# Altium PCB PCB1.PcbDoc
Units mil, origin at the board's own origin, x right, y up, seen from the top; angles counter-clockwise.
Board outline 2740 x 2170 mil, 2 copper layers (Top Layer, Bottom Layer); 18 components, 22 nets, 61 pads, 1 vias.
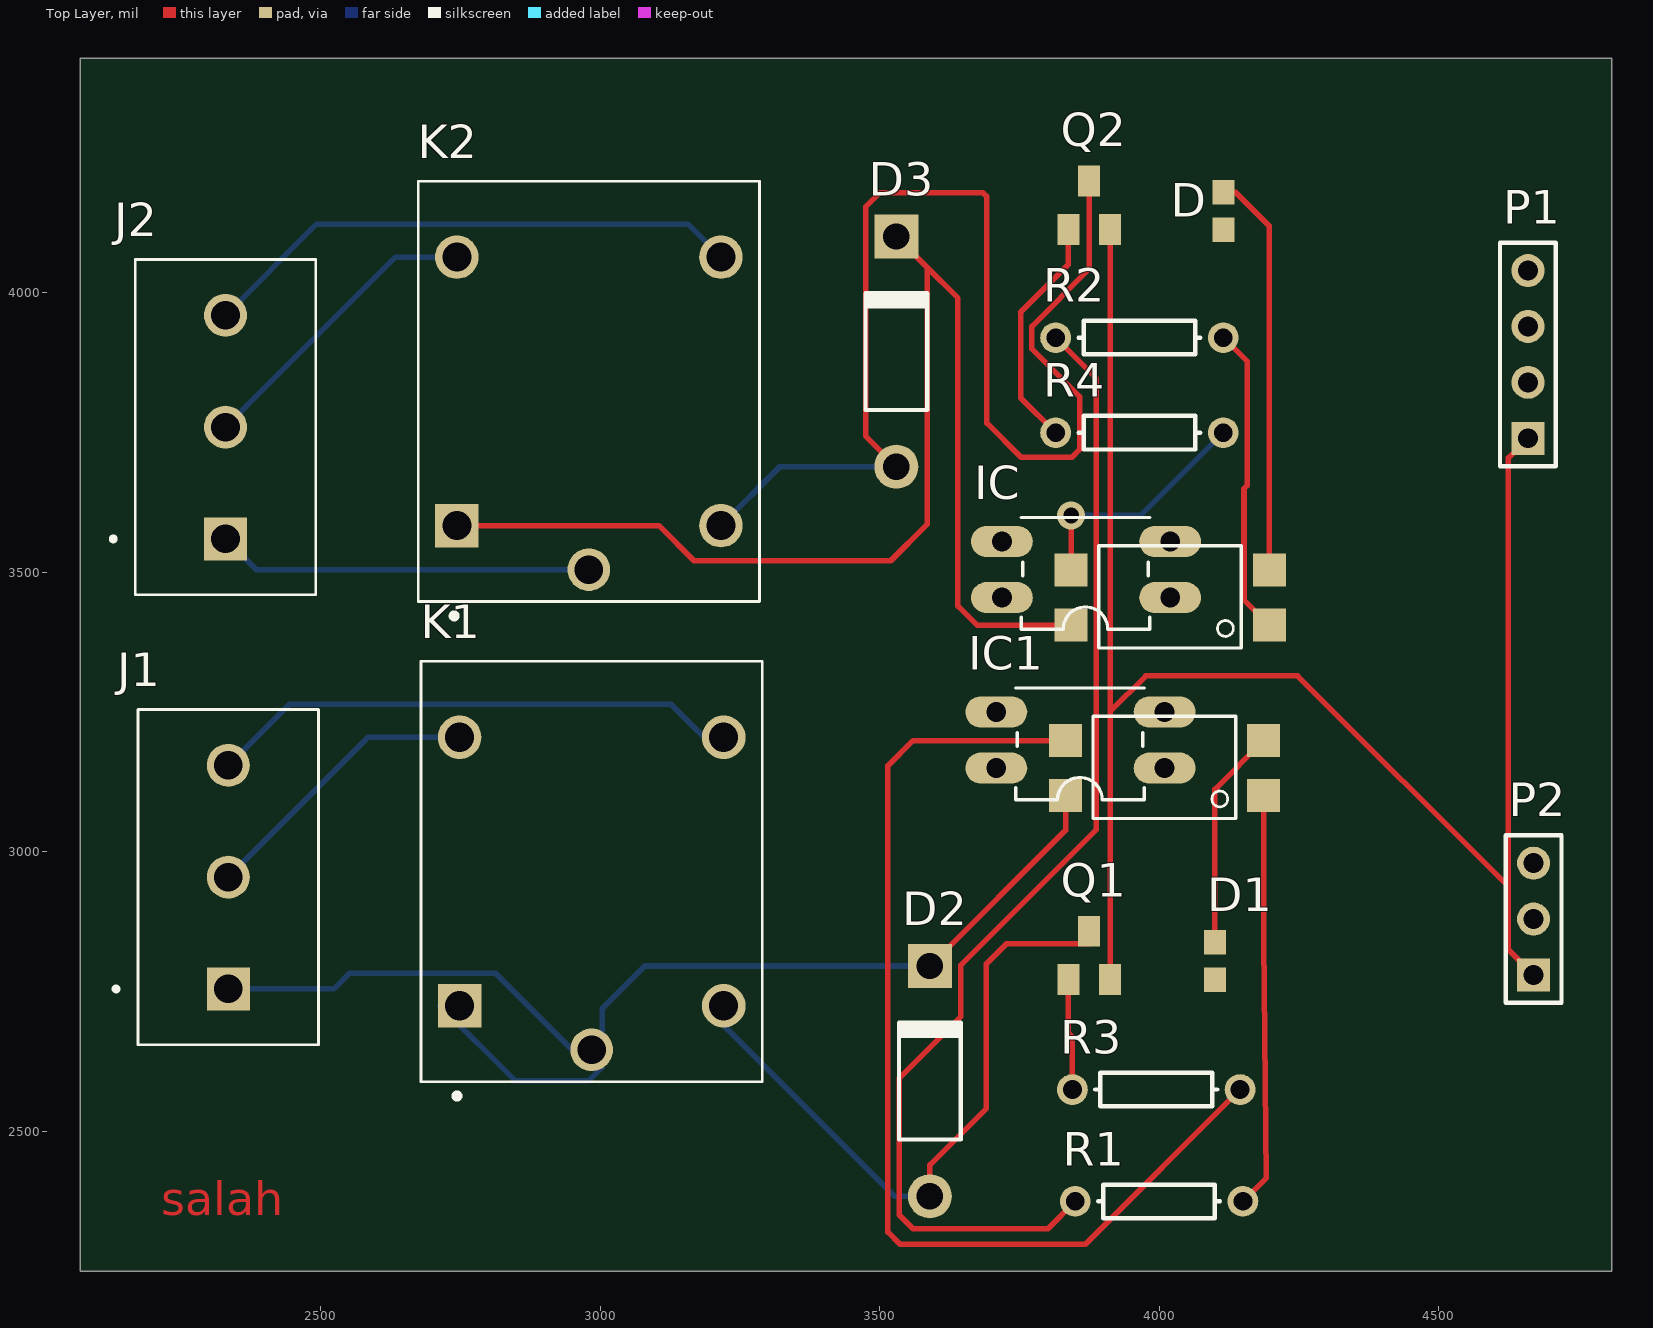
[diagram p0: Top Layer view]
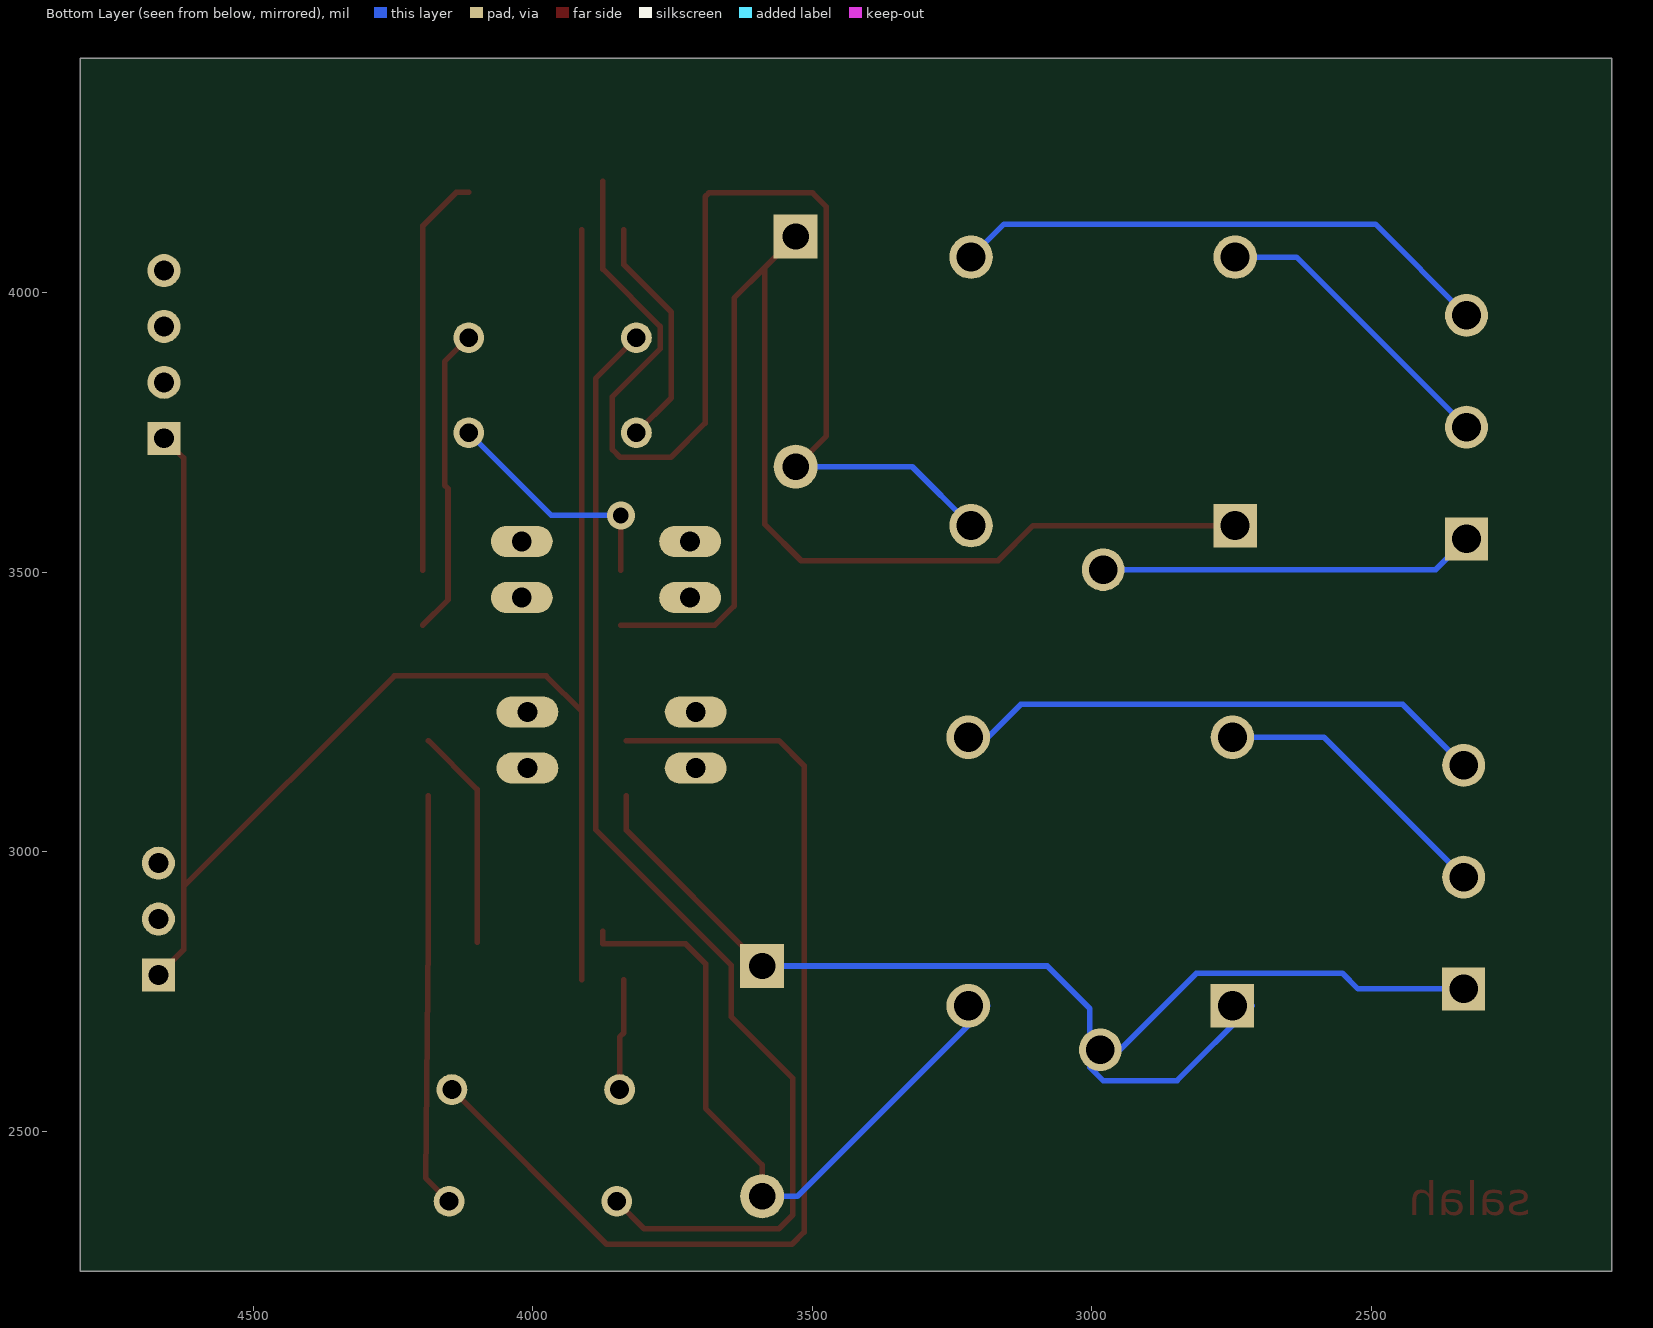
[diagram p1: Bottom Layer view, seen from below]
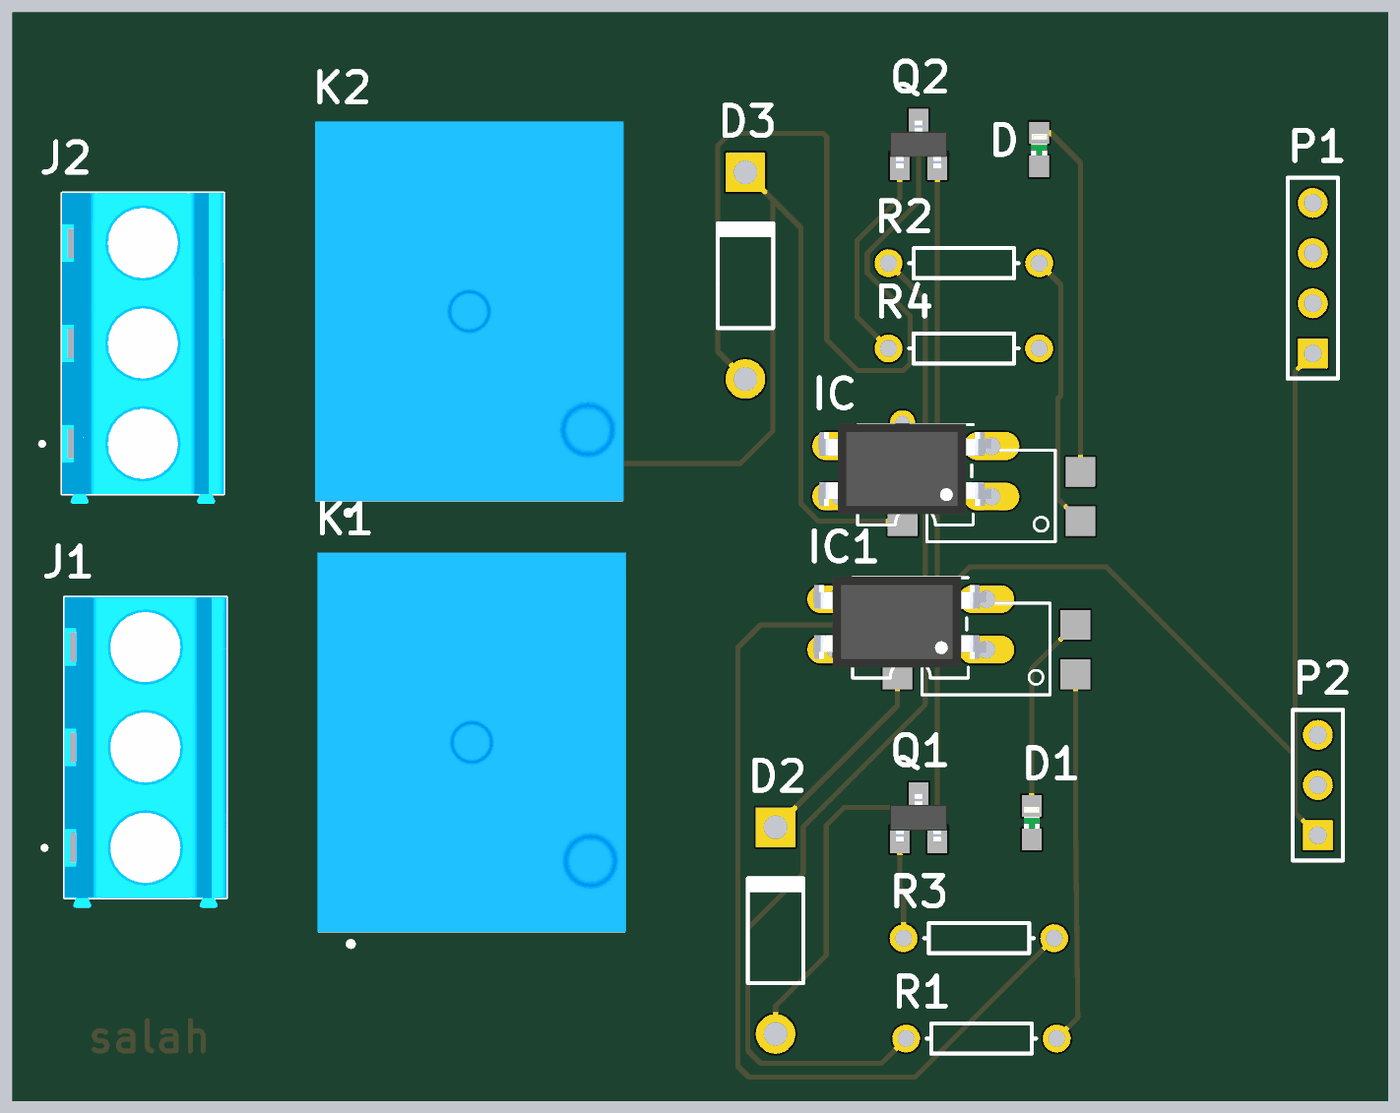
[diagram p2: 3D render of the assembled board from above, using the file's embedded part models]

## Layer stack, top to bottom
Top Solder: solder mask 0.4, Solder Resist, Dk 3.5
Top Layer: signal copper 1.4
Dielectric 1: dielectric 12.6, FR-4, Dk 4.8
Bottom Layer: signal copper 1.4
Bottom Solder: solder mask 0.4, Solder Resist, Dk 3.5

## Board outline
2070,2250 4810,2250 4810,4420 2070,4420

## Design rules (kind name [scope] priority, off if disabled: settings)
Clearance [All] p1: gap=10 ignorepadtopadclearanceinfootprint=FALSE except(0: Arc-Hole Track-Hole SMDPad-Hole THPad-Hole Via-Hole Fill-Hole Poly-Hole Region-Hole Text-Hole)
PolygonConnect [All] p1: connectstyle=Relief reliefconductorwidth=10 reliefentries=4 polygonreliefangle="90 Angle" airgapwidth=10
RoutingVias [All] p1: holewidth=28 width=50 viastyle="Through Hole" minholewidth=28 minwidth=50 maxholewidth=28 maxwidth=50
SolderMaskExpansion [All] p1: expansion=4 istentingtop=FALSE
Width [All] p1: maxlimit=10 minlimit=10 preferedwidth=10
30 further rules are at their usual default settings.

## Components (designator, comment, footprint, x,y, rotation, side; value= is the part's Value field where it differs from the comment)
D "LTST-C193TBKT-5A" 0603 4115,4146.54 r90 top
D1 "LTST-C193TBKT-5A" 0603 4100,2805 r90 top
D2 "Diode 1N4003" DO-41 3590,2590 r90 top
D3 "Diode 1N4003" DO-41 3530,3895 r90 top
IC "LTV-817" DIP-4 4020,3455 r90 top
IC1 "LTV-817" DIP-4 4010,3150 r90 top
J1 "TB006-508-03BE" CUI_TB006-508-03BE 2335,2755 r90 top
J2 "TB006-508-03BE" CUI_TB006-508-03BE 2330,3560 r90 top
K1 "SRD-05VDC-SL-C" RELAY_SRD-05VDC-SL-C 2985,2965 r90 top
K2 "SRD-05VDC-SL-C" RELAY_SRD-05VDC-SL-C 2980,3823.9 r90 top
P1 "Header 4" HDR1X4 4660,3740 r90 top
P2 "Header 3" HDR1X3 4670,2780 r90 top
Q1 "BCW31*" SOT23-BEC 3875,2815 r0 top
Q2 "BCW31*" SOT23-BEC 3875,4156.69 r0 top
R1 "Res1" AXIAL-0.3 4000,2375 r180 top value=1K
R2 "Res1" AXIAL-0.3 3965,3920 r180 top value=1K
R3 "Res1" AXIAL-0.3 3995,2575 r180 top value=510R
R4 "Res1" AXIAL-0.3 3965,3750 r180 top value=510R

## Footprints (in the part's own frame and the unit in brackets; to place one, negate y for a bottom-side part, rotate by r counter-clockwise, add the part's x,y. Pads: shape width x height; smd on the part's side, far side on the other; paste and mask are expansions set on the pad)
0603 [mm]
  rect 1.1x1 smd: 1(-0.85,0) 2(0.85,0)
  body extent -0.8,-0.4 0.8,0.4
AXIAL-0.3 [mm] "Axial Device, Thru-Hole; 2 Leads; 0.3 in Pin Spacing"
  round 1.4 hole 0.85: 1(-3.81,0) 2(3.81,0)
  silkscreen extent -2.77,-0.76 2.77,0.76
CUI_TB006-508-03BE [mm]
  rect 1.95x1.95 / inner round 1.95 / far side rect 1.95x1.95 hole 1.3: 1(0,0)
  round 1.95 hole 1.3: 2(5.08,0) 3(10.16,0)
  silkscreen extent -2.54,-4.1 12.7,5.2, body extent -3.04,-4.1 12.7,4.1, height 10
DIP-4 [mm]
  rect 1.5x1.5 smd: 1(-1.25,-4.5) 2(1.25,-4.5) 3(1.25,4.5) 4(-1.25,4.5)
  oval 1.408x2.816 hole 0.9: P$1(0,0) P$2(2.55,0) P$3(2.55,7.65) P$4(0,7.65)
  silkscreen extent -2.29,-3.22 3.64,6.77, body extent -0.9,0 3.7,9.06, height 5
DO-41 [mm] "Diode, Axial; Body 5.2 x 2.7 mm (LxDia. max), Lead Dia. 0.86 mm (max)"
  round 2 hole 1.2: 1(-5.23,0)
  rect 2x2 hole 1.2: 2(5.23,0)
  silkscreen extent -2.65,-1.4 2.75,1.4
HDR1X3 [mm] "Connector; Header; 3 Position"
  rect 1.5x1.5 hole 0.9: 1(0,0)
  round 1.5 hole 0.9: 2(2.54,0) 3(5.08,0)
  silkscreen extent -1.27,-1.27 6.35,1.27
HDR1X4 [mm] "Connector; Header; 4 Position"
  rect 1.5x1.5 hole 0.9: 1(0,0)
  round 1.5 hole 0.9: 2(2.54,0) 3(5.08,0) 4(7.62,0)
  silkscreen extent -1.27,-1.27 8.89,1.27
RELAY_SRD-05VDC-SL-C [mm]
  rect 1.98x1.98 / inner round 1.98 / far side rect 1.98x1.98 hole 1.32: A1(-6.1,6)
  round 1.98 hole 1.32: A2(-6.1,-6) NC(6.1,6) NO(6.1,-6)
  round 1.935 hole 1.29: COM(-8.1,0)
  silkscreen extent -10.3,-7.75 9.55,7.75, body extent -9.6,-7.8 9.6,7.8, height 15.8
SOT23-BEC [mm]
  rect 1x1.4 smd: B(-0.95,-1.1) C(0,1.1) E(0.95,-1.1)
  body extent -1.45,-1.33 1.45,1.2, height 1.14

## Part data
D D1: "Blue 470nm LED Indication - Discrete 2.8V 0603 _1608 Metric_", Package="0603 Lite-On", Digi-Key_Part_Number=160-1827-1-ND, Digi-Key_Purchase_URL=https://www.digikey.com/product-detail/en/lite-on-inc/LTST-C193TBKT-5A/160-1827-1-ND/2355044?utm_source=snapeda&utm_medium=aggregator&utm_campaign=symbol, MF="Lite-On Inc.", MP=LTST-C193TBKT-5A, SnapEDA_Link=https://www.snapeda.com/parts/LTST-C193TBKT-5A/Lite-On%20Inc./view-part/350303/?ref=snap
D2 D3: "1 Amp General Purpose Rectifier", Code_JEDEC=DO-204-AL, ComponentLink1Description="Manufacturer Link", ComponentLink1URL=http://www.fairchildsemi.com/, ComponentLink2Description=Datasheet, ComponentLink2URL=http://www.fairchildsemi.com/ds/1N%2F1N4001.pdf, DatasheetVersion=1998, LatestRevisionDate=17-Jul-2002, LatestRevisionNote="Re-released for DXP Platform.", PackageDescription="Diode, Axial; Body 5.2 x 2.7 mm (LxDia. max), Lead Dia. 0.86 mm (max)", PackageReference=DO-41, PackageVersion=Aug-1999, Published=8-Jun-2000, Publisher="Altium Limited"
IC IC1: "Optoisolator Transistor Output 5000Vrms 1 Channel 4-SMD", Package="DIP-4 Lite-On Electronics", Availability=Unavailable, MF="Lite-On Electronics", MP=LTV-817, Price=None, SnapEDA_Link=https://www.snapeda.com/parts/LTV-817/ICS/view-part/4478599/?ref=snap
J1 J2: "2~24 Poles, Screw Type, Horizontal, 5.08 Pitch, 26~14 (AWG), Terminal Block Connector", Package=None, Availability="In Stock", Check_prices=https://www.snapeda.com/parts/TB006-508-03BE/CUI+Devices/view-part/?ref=eda, CUI_purchase_URL=https://www.cuidevices.com/product/interconnect/connectors/terminal-blocks/tb006-508-series?utm_source=snapeda.com&utm_medium=referral&utm_campaign=snapedaBOM, MF="CUI Devices", MP=TB006-508-03BE, Price=None, Purchase-URL=https://pricing.snapeda.com/search/part/TB006-508-03BE/?ref=eda, SnapEDA_Link=https://www.snapeda.com/parts/TB006-508-03BE/CUI+Devices/view-part/?ref=snap
K1 K2: "5V Trigger Relay Module For Arduino And Raspberry Pi 5V Trigger Relay Module For Arduino And Raspberry Pi", Package="NON STANDARD-5 Songle Relay", Availability="Not in stock", Check_prices=https://www.snapeda.com/parts/SRD-05VDC-SL-C/Songle+Relay/view-part/?ref=eda, MF="Songle Relay", MP=SRD-05VDC-SL-C, Price=None, SnapEDA_Link=https://www.snapeda.com/parts/SRD-05VDC-SL-C/Songle+Relay/view-part/?ref=snap
P1: "Header, 4-Pin", LatestRevisionDate=17-Jul-2002, LatestRevisionNote="Re-released for DXP Platform.", Publisher="Altium Limited"
P2: "Header, 3-Pin", LatestRevisionDate=17-Jul-2002, LatestRevisionNote="Re-released for DXP Platform.", Publisher="Altium Limited"
Q1 Q2: "Bipolar (BJT) Transistor NPN General Purpose Amplifier Surface Mount", Package="SOT-23 ON Semiconductor", Availability="In Stock", Check_prices=https://www.snapeda.com/parts/BCW31/Onsemi/view-part/?ref=eda, MF="ON Semiconductor", MP=BCW31, Price=None, Purchase-URL=https://pricing.snapeda.com/search?q=BCW31&ref=eda, SnapEDA_Link=https://www.snapeda.com/parts/BCW31/Onsemi/view-part/?ref=snap
R1 R2 R3 R4: "Resistor", LatestRevisionDate=17-Jul-2002, LatestRevisionNote="Re-released for DXP Platform.", PackageDescription="Axial Device, Thru-Hole; 2 Leads; 0.3 in Pin Spacing", PackageReference=AXIAL-0.3, Published=8-Jun-2000, Publisher="Altium Limited"

## Via types
v1: diameter 50, hole 28, Top Layer to Bottom Layer, 1 vias

## Nets (pads, with @x,y where several pads share a name; then routed paths per layer and width w, separated by ;. In a path a pad name is that pad's centre, name@x,y a point inside that pad or via, vN(x,y) a via of type N, cw(c..) or ccw(c..) an arc to the next point about the centre after c; other vN are vias at no path point)
1N1: D.1
1N2: D1.1
GND: P1.1 P2.1 Q1.E Q2.E | length 3230.1
  Top Layer w10: Q1.E 3912.4,3251 ; Q2.E 3912.4,3251 ; P1.1 4625,3705 4625,2938 ; P2.1 4625,2825 4625,2938 ; 3912.4,3251 3976.4,3315 4248,3315 4625,2938
NetD1_2: D1.2 IC1.2 | length 396.9
  Top Layer w10: D1.2 4100,3112.05 IC1.2
NetD2_1: D2.1 K1.A2 Q1.C | length 1224.1
  Top Layer w10: D2.1 3590,2440 3691,2541 3691,2800 3726.68,2835.68 3875,2835.68 Q1.C
  Bottom Layer w10: K1.A2@3186.22,2724.84 3526.97,2384.09 D2.1
NetD2_2: D2.2 IC1.4 K1.A1 | length 1483.5
  Top Layer w10: D2.2 3832.83,3038.74 IC1.4
  Bottom Layer w10: K1.A1@2713.78,2724.84 2847.62,2591 2980,2591 3004,2615 3004,2720 3079.91,2795.91 D2.2
NetD3_1: D3.1 K2.A2 Q2.C | length 2235.3
  Top Layer w10: D3.1 3475,3744.09 3475,4154 3500,4179 3685,4179 3692,4172 3692,3767 3753,3706 3844,3706 3858,3720 3858,3814.44 3772.44,3900 3772.44,3940 3875,4042.56 Q2.C
  Bottom Layer w10: K2.A2 3321.57,3689.09 D3.1
NetD3_2: D3.2 IC.4 K2.A1 | length 2277.4
  Top Layer w10: K2.A1 3105.26,3583.74 3168,3521 3520,3521 3585,3586 3585,4045.91 ; D3.2 3585,4045.91 ; IC.4 3674.42,3405.79 3640.21,3440 3640.21,3990.69 3585,4045.91
NetD_2: D.2 IC.2 | length 722.8
  Top Layer w10: D.2 4137.17,4180 4197.17,4120 IC.2
NetIC1_1: IC1.1 R1.1 | length 743.2
  Top Layer w10: R1.1 4192,2417 4187.17,2839.83 IC1.1
NetIC1_3: IC1.3 R3.1 | length 1924.5
  Top Layer w10: IC1.3 3560,3199.21 3515,3154.21 3515,2320 3537,2298 3868,2298 R3.1
NetIC_1: IC.1 R2.1 | length 553.2
  Top Layer w10: R2.1 4158,3877 4158,3656 4152,3650 4152,3450.95 IC.1
NetIC_3: IC.3 R4.1 | length 431.3
  Top Layer w10: IC.3 v1(3842.83,3602)
  Bottom Layer w10: v1(3842.83,3602) 3967,3602 R4.1
NetJ1_1: J1.1 K1.COM | length 683.3
  Bottom Layer w10: J1.1 2524,2755 2552,2783 2813.1,2783 K1.COM@2950,2646.1
NetJ1_2: J1.2 K1.NC | length 482.4
  Bottom Layer w10: J1.2 2585.16,3205.16 K1.NC@2713.78,3205.16
NetJ1_3: J1.3 K1.NO | length 920.7
  Bottom Layer w10: J1.3 2444,3264 3127.38,3264 K1.NO@3186.22,3205.16
NetJ2_1: J2.1 K2.COM | length 672.8
  Bottom Layer w10: J2.1 2385,3505 K2.COM
NetJ2_2: J2.2 K2.NC | length 539.7
  Bottom Layer w10: J2.2 2634.06,4064.06 K2.NC
NetJ2_3: J2.3 K2.NO | length 978.2
  Bottom Layer w10: J2.3 2493,4123 3157.28,4123 K2.NO
NetQ1_B: Q1.B R3.2 | length 199.8
  Top Layer w10: Q1.B 3837.6,2676.4 3845,2669 R3.2
NetQ2_B: Q2.B R4.2 | length 424.6
  Top Layer w10: R4.2 3752.44,3812.56 3752.44,3965.44 3837.6,4050.6 Q2.B
VCC: R1.2 R2.2 | length 2091.1
  Top Layer w10: R2.2 3888,3847 3888,3040 3645,2797 3645,2705 3535,2595 3535,2351 3560,2326 3801,2326 R1.2
pads on no net: IC1.P$1 IC1.P$2 IC1.P$3 IC1.P$4 IC.P$1 IC.P$2 IC.P$3 IC.P$4 P1.2 P1.3 P1.4 P2.2 P2.3

## Other copper
Top Layer:
  text "salah" at 2215,2350 h60